# Altium PCB V_5.PcbDoc
Units mm, origin at the board's own origin, x right, y up, seen from the top; angles counter-clockwise.
Board outline 69.85 x 19.9 mm, 2 copper layers (Top Layer, Bottom Layer); 10 components, 43 nets, 80 pads, 40 vias.
Unrouted connection lines stored in the file: 1.
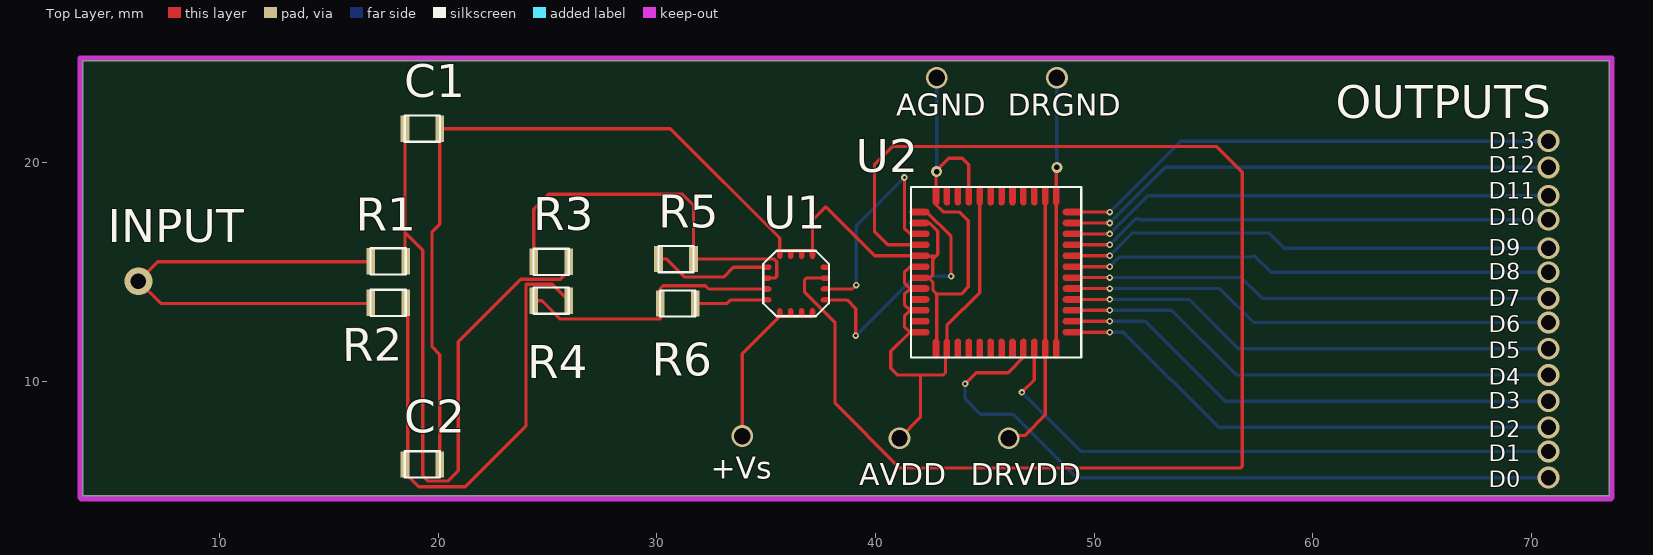
[diagram p0: Top Layer view]
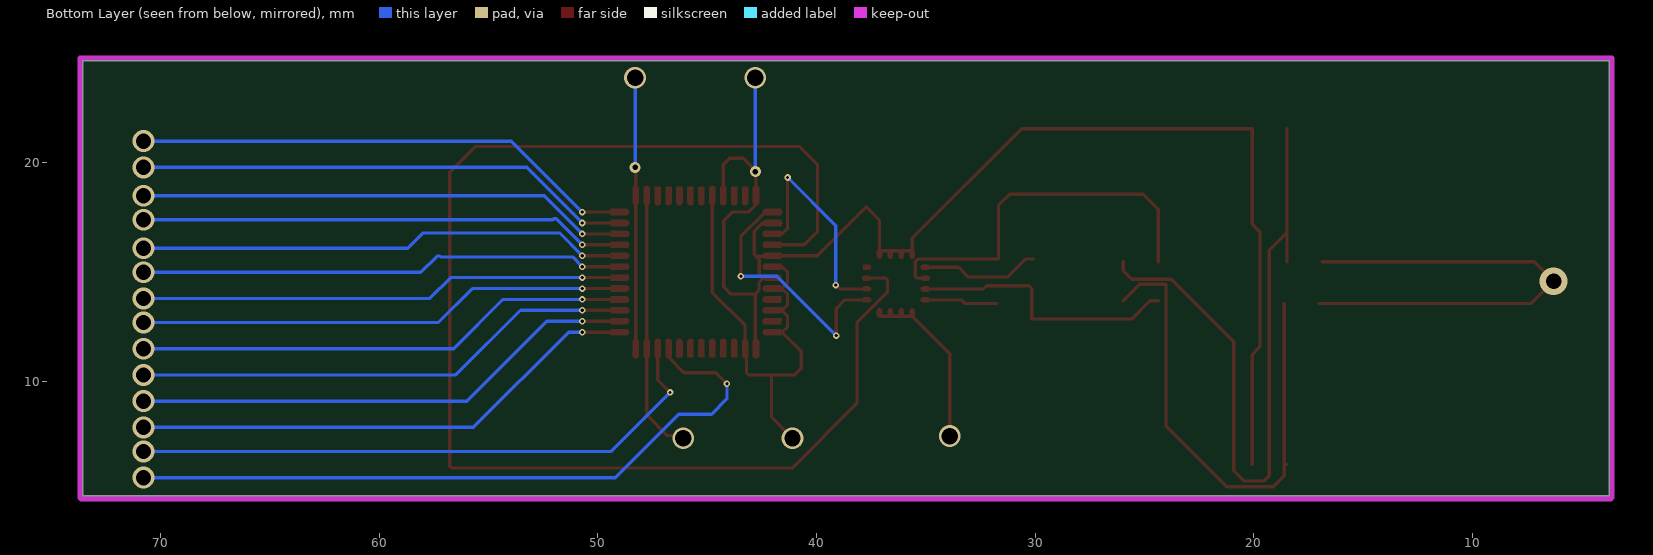
[diagram p1: Bottom Layer view, seen from below]

## Layer stack, top to bottom
Top Solder: solder mask 0.0102, Solder Resist, Dk 3.5
Top Layer: signal copper 0.0356
Dielectric 1: dielectric 0.32, FR-4, Dk 4.8
Bottom Layer: signal copper 0.0356
Bottom Solder: solder mask 0.0102, Solder Resist, Dk 3.5

## Board outline
3.727,4.768 3.727,24.673 73.573,24.673 73.573,4.768

## Design rules (kind name [scope] priority, off if disabled: settings)
Clearance [All] p1: gap=0.08 ignorepadtopadclearanceinfootprint=FALSE
PolygonConnect [All] p1: connectstyle=Relief reliefconductorwidth=0.254 reliefentries=4 polygonreliefangle="90 Angle" airgapwidth=0.254
RoutingTopology [All] p1: topology=Daisy_MidDriven
RoutingVias [All] p1: holewidth=0.711 width=1.27 viastyle="Through Hole" minholewidth=0.711 minwidth=1.27 maxholewidth=0.711 maxwidth=1.27
SolderMaskExpansion [All] p1: expansion=0.102 istentingtop=FALSE
Width [All] p1: maxlimit=0.15 minlimit=0.15 preferedwidth=0.15
29 further rules are at their usual default settings.

## Components (designator, comment, footprint, x,y, rotation, side; value= is the part's Value field where it differs from the comment)
C1 "Capacitor" PCB_C 19.937,21.571 r180 top
C2 "Capacitor" PCB_C 18.591,6.204 r0 top
R1 "Resistor" PCB_R 18.5,15.5 r180 top
R2 "Resistor" PCB_R 18.5,13.6 r180 top
R3 "Resistor" PCB_R 24.357,15.475 r0 top
R4 "Resistor" PCB_R 24.357,13.697 r0 top
R5 "Resistor" PCB_R 31.672,15.602 r180 top
R6 "Resistor" PCB_R 31.748,13.57 r180 top
U1 "Operational_amplifier" PCB_OA 34.867,12.983 r0 top
U2 "Analog-to-Digital_Converter" PCB_ADC 41.619,18.904 r270 top

## Footprints (in the part's own frame and the unit in brackets; to place one, negate y for a bottom-side part, rotate by r counter-clockwise, add the part's x,y. Pads: shape width x height; smd on the part's side, far side on the other; paste and mask are expansions set on the pad)
PCB_ADC [mil]
  round 1 smd mask+2.76: 1(0,261.81) 2(0,242.13) 3(0,222.44) 4(0,202.76) 5(0,183.07) 6(0,163.39) 7(0,143.7) 8(0,124.02) 9(0,104.33) 10(0,84.65) 11(0,64.96) 12(0,45.28) 13(45.28,0) 14(64.96,0) 15(84.65,0) 16(104.33,0) 17(124.02,0) 18(143.7,0) 19(163.39,0) 20(183.07,0) 21(202.76,0) 22(222.44,0) 23(242.13,0) 24(261.81,0) 25(307.09,45.28) 26(307.09,64.96) 27(307.09,84.65) 28(307.09,104.33) 29(307.09,124.02) 30(307.09,143.7) 31(307.09,163.39) 32(307.09,183.07) 33(307.09,202.76) 34(307.09,222.44) 35(307.09,242.13) 36(307.09,261.81) 37(261.81,307.09) 38(242.13,307.09) 39(222.44,307.09) 40(202.76,307.09) 41(183.07,307.09) 42(163.39,307.09) 43(143.7,307.09) 44(124.02,307.09) 45(104.33,307.09) 46(84.65,307.09) 47(64.96,307.09) 48(45.28,307.09)
  Top Layer region: 307.09,157.87 279.13,157.87 276.74,158.42 274.82,159.95 273.76,162.16 273.76,164.61 274.82,166.82 276.74,168.35 279.13,168.9 279.13,168.9 307.09,168.9
  Top Layer region: 307.09,138.19 279.13,138.19 276.74,138.73 274.82,140.26 273.76,142.47 273.76,144.93 274.82,147.14 276.74,148.67 279.13,149.21 279.13,149.21 307.09,149.21
  Top Layer region: 307.09,118.5 279.13,118.5 276.74,119.05 274.82,120.58 273.76,122.79 273.76,125.24 274.82,127.45 276.74,128.98 279.13,129.53 279.13,129.53 307.09,129.53
  Top Layer region: 307.09,98.82 279.13,98.82 276.74,99.36 274.82,100.89 273.76,103.1 273.76,105.56 274.82,107.77 276.74,109.3 279.13,109.84 279.13,109.84 307.09,109.84
  Top Layer region: 307.09,79.13 279.13,79.13 276.74,79.68 274.82,81.21 273.76,83.42 273.76,85.87 274.82,88.08 276.74,89.61 279.13,90.16 279.13,90.16 307.09,90.16
  Top Layer region: 307.09,59.45 279.13,59.45 276.74,59.99 274.82,61.52 273.76,63.73 273.76,66.19 274.82,68.4 276.74,69.93 279.13,70.47 279.13,70.47 307.09,70.47
  Top Layer region: 157.87,0 157.87,27.95 158.42,30.34 159.95,32.26 162.16,33.33 164.61,33.33 166.82,32.26 168.35,30.34 168.9,27.95 168.9,27.95 168.9,0
  Top Layer region: 177.56,0 177.56,27.95 178.1,30.34 179.63,32.26 181.84,33.33 184.3,33.33 186.51,32.26 188.04,30.34 188.58,27.95 188.58,27.95 188.58,0
  Top Layer region: 197.24,0 197.24,27.95 197.79,30.34 199.32,32.26 201.53,33.33 203.98,33.33 206.19,32.26 207.72,30.34 208.27,27.95 208.27,27.95 208.27,0
  Top Layer region: 216.93,0 216.93,27.95 217.47,30.34 219,32.26 221.21,33.33 223.67,33.33 225.88,32.26 227.41,30.34 227.95,27.95 227.95,27.95 227.95,0
  Top Layer region: 256.3,0 256.3,27.95 256.85,30.34 258.37,32.26 260.58,33.33 263.04,33.33 265.25,32.26 266.78,30.34 267.32,27.95 267.32,27.95 267.32,0
  Top Layer region: 307.09,39.76 279.13,39.76 276.74,40.31 274.82,41.84 273.76,44.05 273.76,46.5 274.82,48.71 276.74,50.24 279.13,50.79 279.13,50.79 307.09,50.79
  Top Layer region: 236.61,0 236.61,27.95 237.16,30.34 238.69,32.26 240.9,33.33 243.35,33.33 245.56,32.26 247.09,30.34 247.64,27.95 247.64,27.95 247.64,0
  Top Layer region: 138.19,0 138.19,27.95 138.73,30.34 140.26,32.26 142.47,33.33 144.93,33.33 147.14,32.26 148.67,30.34 149.21,27.95 149.21,27.95 149.21,0
  Top Layer region: 59.45,0 59.45,27.95 59.99,30.34 61.52,32.26 63.73,33.33 66.19,33.33 68.4,32.26 69.93,30.34 70.47,27.95 70.47,27.95 70.47,0
  Top Layer region: 79.13,0 79.13,27.95 79.68,30.34 81.21,32.26 83.42,33.33 85.87,33.33 88.08,32.26 89.61,30.34 90.16,27.95 90.16,27.95 90.16,0
  Top Layer region: 118.5,0 118.5,27.95 119.05,30.34 120.58,32.26 122.79,33.33 125.24,33.33 127.45,32.26 128.98,30.34 129.53,27.95 129.53,27.95 129.53,0
  Top Layer region: 98.82,0 98.82,27.95 99.36,30.34 100.89,32.26 103.1,33.33 105.56,33.33 107.77,32.26 109.3,30.34 109.84,27.95 109.84,27.95 109.84,0
  Top Layer region: 39.76,0 39.76,27.95 40.31,30.34 41.84,32.26 44.05,33.33 46.5,33.33 48.71,32.26 50.24,30.34 50.79,27.95 50.79,27.95 50.79,0
  Top Layer region: 307.09,197.24 279.13,197.24 276.74,197.79 274.82,199.32 273.76,201.53 273.76,203.98 274.82,206.19 276.74,207.72 279.13,208.27 279.13,208.27 307.09,208.27
  Top Layer region: 307.09,177.56 279.13,177.56 276.74,178.1 274.82,179.63 273.76,181.84 273.76,184.3 274.82,186.51 276.74,188.04 279.13,188.58 279.13,188.58 307.09,188.58
  Top Layer region: 39.76,307.09 39.76,279.13 40.31,276.74 41.84,274.82 44.05,273.76 46.5,273.76 48.71,274.82 50.24,276.74 50.79,279.13 50.79,279.13 50.79,307.09
  Top Layer region: 59.45,307.09 59.45,279.13 59.99,276.74 61.52,274.82 63.73,273.76 66.19,273.76 68.4,274.82 69.93,276.74 70.47,279.13 70.47,279.13 70.47,307.09
  Top Layer region: 138.19,307.09 138.19,279.13 138.73,276.74 140.26,274.82 142.47,273.76 144.93,273.76 147.14,274.82 148.67,276.74 149.21,279.13 149.21,279.13 149.21,307.09
  Top Layer region: 157.87,307.09 157.87,279.13 158.42,276.74 159.95,274.82 162.16,273.76 164.61,273.76 166.82,274.82 168.35,276.74 168.9,279.13 168.9,279.13 168.9,307.09
  Top Layer region: 177.56,307.09 177.56,279.13 178.1,276.74 179.63,274.82 181.84,273.76 184.3,273.76 186.51,274.82 188.04,276.74 188.58,279.13 188.58,279.13 188.58,307.09
  Top Layer region: 197.24,307.09 197.24,279.13 197.79,276.74 199.32,274.82 201.53,273.76 203.98,273.76 206.19,274.82 207.72,276.74 208.27,279.13 208.27,279.13 208.27,307.09
  Top Layer region: 216.93,307.09 216.93,279.13 217.47,276.74 219,274.82 221.21,273.76 223.67,273.76 225.88,274.82 227.41,276.74 227.95,279.13 227.95,279.13 227.95,307.09
  Top Layer region: 79.13,307.09 79.13,279.13 79.68,276.74 81.21,274.82 83.42,273.76 85.87,273.76 88.08,274.82 89.61,276.74 90.16,279.13 90.16,279.13 90.16,307.09
  Top Layer region: 118.5,307.09 118.5,279.13 119.05,276.74 120.58,274.82 122.79,273.76 125.24,273.76 127.45,274.82 128.98,276.74 129.53,279.13 129.53,279.13 129.53,307.09
  Top Layer region: 236.61,307.09 236.61,279.13 237.16,276.74 238.69,274.82 240.9,273.76 243.35,273.76 245.56,274.82 247.09,276.74 247.64,279.13 247.64,279.13 247.64,307.09
  Top Layer region: 98.82,307.09 98.82,279.13 99.36,276.74 100.89,274.82 103.1,273.76 105.56,273.76 107.77,274.82 109.3,276.74 109.84,279.13 109.84,279.13 109.84,307.09
  Top Layer region: 256.3,307.09 256.3,279.13 256.85,276.74 258.37,274.82 260.58,273.76 263.04,273.76 265.25,274.82 266.78,276.74 267.32,279.13 267.32,279.13 267.32,307.09
  Top Layer region: 307.09,216.93 279.13,216.93 276.74,217.47 274.82,219 273.76,221.21 273.76,223.67 274.82,225.88 276.74,227.41 279.13,227.95 279.13,227.95 307.09,227.95
  Top Layer region: 307.09,236.61 279.13,236.61 276.74,237.16 274.82,238.69 273.76,240.9 273.76,243.35 274.82,245.56 276.74,247.09 279.13,247.64 279.13,247.64 307.09,247.64
  Top Layer region: 307.09,256.3 279.13,256.3 276.74,256.85 274.82,258.37 273.76,260.58 273.76,263.04 274.82,265.25 276.74,266.78 279.13,267.32 279.13,267.32 307.09,267.32
  Top Layer region: 0,109.84 27.95,109.84 30.34,109.3 32.26,107.77 33.33,105.56 33.33,103.1 32.26,100.89 30.34,99.36 27.95,98.82 27.95,98.82 0,98.82
  Top Layer region: 0,129.53 27.95,129.53 30.34,128.98 32.26,127.45 33.33,125.24 33.33,122.79 32.26,120.58 30.34,119.05 27.95,118.5 27.95,118.5 0,118.5
  Top Layer region: 0,149.21 27.95,149.21 30.34,148.67 32.26,147.14 33.33,144.93 33.33,142.47 32.26,140.26 30.34,138.73 27.95,138.19 27.95,138.19 0,138.19
  Top Layer region: 0,168.9 27.95,168.9 30.34,168.35 32.26,166.82 33.33,164.61 33.33,162.16 32.26,159.95 30.34,158.42 27.95,157.87 27.95,157.87 0,157.87
  Top Layer region: 0,188.58 27.95,188.58 30.34,188.04 32.26,186.51 33.33,184.3 33.33,181.84 32.26,179.63 30.34,178.1 27.95,177.56 27.95,177.56 0,177.56
  Top Layer region: 0,208.27 27.95,208.27 30.34,207.72 32.26,206.19 33.33,203.98 33.33,201.53 32.26,199.32 30.34,197.79 27.95,197.24 27.95,197.24 0,197.24
  Top Layer region: 0,227.95 27.95,227.95 30.34,227.41 32.26,225.88 33.33,223.67 33.33,221.21 32.26,219 30.34,217.47 27.95,216.93 27.95,216.93 0,216.93
  Top Layer region: 0,247.64 27.95,247.64 30.34,247.09 32.26,245.56 33.33,243.35 33.33,240.9 32.26,238.69 30.34,237.16 27.95,236.61 27.95,236.61 0,236.61
  Top Layer region: 0,267.32 27.95,267.32 30.34,266.78 32.26,265.25 33.33,263.04 33.33,260.58 32.26,258.37 30.34,256.85 27.95,256.3 27.95,256.3 0,256.3
  Top Layer region: 0,70.47 27.95,70.47 30.34,69.93 32.26,68.4 33.33,66.19 33.33,63.73 32.26,61.52 30.34,59.99 27.95,59.45 27.95,59.45 0,59.45
  Top Layer region: 0,90.16 27.95,90.16 30.34,89.61 32.26,88.08 33.33,85.87 33.33,83.42 32.26,81.21 30.34,79.68 27.95,79.13 27.95,79.13 0,79.13
  Top Layer region: 0,50.79 27.95,50.79 30.34,50.24 32.26,48.71 33.33,46.5 33.33,44.05 32.26,41.84 30.34,40.31 27.95,39.76 27.95,39.76 0,39.76
  silkscreen extent 0,0 307,307
PCB_C [mm]
  rect 0.4x1.2 smd mask+0.07: 1(1.473,0) 2(-0.127,0)
  silkscreen extent -0.13,-0.6 1.48,0.6
PCB_OA [mil]
  round 1 smd mask+2.76: 1(0,88.58) 2(0,68.9) 3(0,49.21) 4(0,29.53) 5(29.54,0) 6(49.22,0) 7(68.91,0) 8(88.59,0) 9(118.11,29.54) 10(118.11,49.22) 11(118.11,68.91) 12(118.11,88.59) 13(88.57,118.11) 14(68.89,118.11) 15(49.21,118.11) 16(29.52,118.11)
  Top Layer region: 93.1,118.11 93.1,108.27 92.65,106.3 91.39,104.73 89.58,103.85 87.56,103.85 85.75,104.73 84.49,106.3 84.04,108.27 84.04,108.27 84.04,118.11
  Top Layer region: 34.04,118.11 34.04,108.27 33.6,106.3 32.34,104.73 30.52,103.85 28.51,103.85 26.69,104.73 25.44,106.3 24.99,108.27 24.99,108.27 24.99,118.11
  Top Layer region: 73.41,118.11 73.41,108.27 72.97,106.3 71.71,104.73 69.89,103.85 67.88,103.85 66.06,104.73 64.81,106.3 64.36,108.27 64.36,108.27 64.36,118.11
  Top Layer region: 53.74,118.11 53.74,108.27 53.29,106.3 52.04,104.73 50.22,103.85 48.21,103.85 46.39,104.73 45.13,106.3 44.68,108.27 44.68,108.27 44.68,118.11
  Top Layer region: 118.11,84.07 108.27,84.07 106.3,84.51 104.73,85.77 103.85,87.59 103.85,89.6 104.73,91.42 106.3,92.67 108.27,93.12 108.27,93.12 118.11,93.12
  Top Layer region: 0,93.11 9.84,93.11 11.81,92.66 13.38,91.41 14.26,89.59 14.26,87.58 13.38,85.76 11.81,84.5 9.84,84.06 9.84,84.06 0,84.06
  Top Layer region: 118.11,25.01 108.27,25.01 106.3,25.46 104.73,26.72 103.85,28.53 103.85,30.55 104.73,32.36 106.3,33.62 108.27,34.07 108.27,34.07 118.11,34.07
  Top Layer region: 84.07,0 84.07,9.84 84.51,11.81 85.77,13.38 87.59,14.26 89.6,14.26 91.42,13.38 92.67,11.81 93.12,9.84 93.12,9.84 93.12,0
  Top Layer region: 25.01,0 25.01,9.84 25.46,11.81 26.72,13.38 28.53,14.26 30.55,14.26 32.36,13.38 33.62,11.81 34.07,9.84 34.07,9.84 34.07,0
  Top Layer region: 44.7,0 44.7,9.84 45.14,11.81 46.4,13.38 48.22,14.26 50.23,14.26 52.05,13.38 53.3,11.81 53.75,9.84 53.75,9.84 53.75,0
  Top Layer region: 64.38,0 64.38,9.84 64.83,11.81 66.09,13.38 67.9,14.26 69.92,14.26 71.73,13.38 72.99,11.81 73.44,9.84 73.44,9.84 73.44,0
  Top Layer region: 118.11,44.7 108.27,44.7 106.3,45.14 104.73,46.4 103.85,48.22 103.85,50.23 104.73,52.05 106.3,53.3 108.27,53.75 108.27,53.75 118.11,53.75
  Top Layer region: 118.11,64.38 108.27,64.38 106.3,64.83 104.73,66.09 103.85,67.9 103.85,69.92 104.73,71.73 106.3,72.99 108.27,73.44 108.27,73.44 118.11,73.44
  Top Layer region: 0,34.06 9.84,34.06 11.81,33.61 13.38,32.35 14.26,30.54 14.26,28.52 13.38,26.7 11.81,25.45 9.84,25 9.84,25 0,25
  Top Layer region: 0,73.43 9.84,73.43 11.81,72.98 13.38,71.72 14.26,69.91 14.26,67.89 13.38,66.07 11.81,64.82 9.84,64.37 9.84,64.37 0,64.37
  Top Layer region: 0,53.74 9.84,53.74 11.81,53.29 13.38,52.04 14.26,50.22 14.26,48.21 13.38,46.39 11.81,45.13 9.84,44.69 9.84,44.69 0,44.69
  silkscreen extent 0,0 118,118
PCB_R [mm]
  rect 0.4x1.2 smd mask+0.07: 1(1.6,0) 2(0,0)
  silkscreen extent 0,-0.6 1.6,0.6

## Part data
C1 C2: Capacitance="1 mF"
R1 R2 R3 R4 R5 R6: Resistance="1 K"

## Via types
v1: diameter 0.3, hole 0.15, Top Layer to Bottom Layer, 18 vias
v2: diameter 1, hole 0.7, Top Layer to Bottom Layer, 14 vias
v3: diameter 1, hole 0.75, Top Layer to Bottom Layer, 5 vias
v4: diameter 0.5, hole 0.25, Top Layer to Bottom Layer, 2 vias
v5: diameter 1.27, hole 0.711, Top Layer to Bottom Layer, 1 vias

## Nets (pads, with @x,y where several pads share a name; then routed paths per layer and width w, separated by ;. In a path a pad name is that pad's centre, name@x,y a point inside that pad or via, vN(x,y) a via of type N, cw(c..) or ccw(c..) an arc to the next point about the centre after c; other vN are vias at no path point)
GND: C1.2 C2.1 U1.13 U1.14 U1.15 U1.16 U2.1 U2.9 U2.12 U2.14 U2.17 U2.19 U2.25 U2.36 | length 79
  Top Layer w0.15: C2.1 20.064,11.233 19.709,11.589 19.709,16.847 20.064,17.202 C1.2 30.613,21.571 35.617,16.567 U1.16 U1.14 U1.13 37.117,17.38 37.727,17.99 39.962,15.754 U2.17 41.644,15.729 42.76,15.729 ; U2.14 42.466,17.254 42.848,16.872 42.848,15.817 42.76,15.729 ; U2.25 42.797,11.132 42.797,14.002 ; U2.9 44.269,19.92 43.967,20.222 43.356,20.222 42.8,19.666 v4(42.8,19.6) 42.769,19.569 42.769,18.094 43.102,17.761 43.839,17.761 44.248,17.352 44.248,14.335 43.915,14.002 42.797,14.002 ; U2.36 U2.1 48.269,19.769 v4(48.3,19.8) ; 42.76,15.729 42.624,15.593 42.624,14.87 42.467,14.713 42.632,14.548 42.632,14.167 42.797,14.002
  Bottom Layer w0.15: v4(42.8,19.6) v3(42.8,23.9) ; v4(48.3,19.8) v3(48.3,23.9)
NetC1_1: C1.1 R1.2 R3.1 | length 32.2
  Top Layer w0.15: R1.2@18.464,15.475 18.464,16.821 ; C1.1 18.464,16.821 ; R3.1 25.957,15.069 25.57,14.682 23.772,14.682 20.902,11.813 20.902,5.925 20.42,5.442 19.531,5.442 19.277,5.696 19.277,16.008 18.464,16.821
NetC2_2: C2.2 R2.2 R4.1 | length 23.5
  Top Layer w0.15: C2.2 C2.2@18.591,6.204 ; R2.2@18.591,13.57 C2.2@18.591,6.204 ; R4.1 25.202,14.452 24.001,14.452 24.001,7.957 21.233,5.188 19.099,5.188 18.591,5.696 C2.2@18.591,6.204
NetR1_1: R1.1 R2.1 | length 22.1
  Top Layer w0.15: R1.1@16.864,15.475 7.161,15.475 v5(6.272,14.586) 7.288,13.57 R2.1@16.991,13.57
NetR3_2: R3.2 R5.2 U1.2 | length 17.9
  Top Layer w0.15: R3.2 24.357,17.888 25.043,18.574 31.164,18.574 31.672,18.066 R5.2 35.366,15.602 35.482,15.486 35.482,14.821 35.394,14.733 U1.2
NetR4_2: R4.2 R6.1 U1.3 | length 12.4
  Top Layer w0.15: R4.2 24.738,13.697 25.576,12.859 30.148,12.859 30.148,14.256 30.275,14.383 32.208,14.383 32.358,14.233 U1.3
NetR5_1: R5.1 U1.1 | length 5.3
  Top Layer w0.15: R5.1 30.453,15.602 31.276,14.779 33.047,14.779 33.501,15.233 U1.1
NetR6_2: R6.2 U1.4 | length 3.2
  Top Layer w0.15: R6.2 33.221,13.57 33.384,13.733 U1.4
NetU1_5: U1.5 U1.6 U1.7 U1.8 | length 7.7
  Top Layer w0.15: v3(33.9,7.5) 33.9,11.265 U1.5 U1.6 U1.7 U1.8
NetU1_9: U1.9 U2.13 | length 12.2
  Top Layer w0.15: U1.9 38.697,13.733 39.1,13.33 v1(39.1,12.1) ; U2.13 42.34,17.754 43.458,16.636 v1(43.458,14.815)
  Bottom Layer w0.15: v1(39.1,12.1) 41.815,14.815 v1(43.458,14.815)
NetU1_10: U1.10 U2.15 | length 9.9
  Top Layer w0.15: U1.10 38.936,14.233 v1(39.114,14.411) ; v1(41.324,19.336) 41.324,17.008 41.578,16.754 U2.15
  Bottom Layer w0.15: v1(39.114,14.411) 39.114,17.126 v1(41.324,19.336)
NetU1_11: U1.11 U2.16 | length 63.4
  Top Layer w0.15: U1.11@37.867,14.733 36.84,14.733 36.752,14.645 36.752,14.078 38.149,12.681 38.149,8.998 41.11,6.037 56.69,6.037 56.778,6.125 56.778,19.579 55.599,20.758 40.791,20.758 39.952,19.92 39.952,16.872 40.57,16.254 U2.16
NetU2_2: U2.2 U2.35 | length 12.5
  Top Layer w0.15: v3(46.1,7.4) 46.225,7.525 46.825,7.525 47.769,8.469 U2.35 U2.2
NetU2_3: U2.3
NetU2_4: U2.4
NetU2_5: U2.5
NetU2_6: U2.6
NetU2_7: U2.7
NetU2_8: U2.8 U2.18 U2.20 U2.22 U2.24 U2.26 | length 20.8
  Top Layer w0.15: v3(41.1,7.4) 42.056,8.356 42.056,10.3 ; U2.18 41.578,15.254 41.324,15 41.324,14.522 41.592,14.254 41.324,13.986 41.324,13.519 41.589,13.254 41.324,12.989 41.324,12.508 41.578,12.254 40.7,11.376 40.7,10.6 41,10.3 42.056,10.3 ; U2.8 44.769,14.069 43.269,12.569 U2.26 43.2,11.035 43.2,10.388 43.112,10.3 42.056,10.3
NetU2_10: U2.10
NetU2_11: U2.11
NetU2_21: U2.21
NetU2_23: U2.23
NetU2_27: U2.27
NetU2_28: U2.28
NetU2_29: U2.29
NetU2_30: U2.30
NetU2_31: U2.31
NetU2_32: U2.32
NetU2_33: U2.33 | length 32.1
  Top Layer w0.15: v1(44.1,9.9) 44.6,10.4 46.065,10.4 U2.33
  Bottom Layer w0.15: v1(44.1,9.9) 44.1,9.2 44.8,8.5 46.3,8.5 49.2,5.6 v2(70.8,5.6)
NetU2_34: U2.34 | length 27.1
  Top Layer w0.15: v1(46.7,9.5) 47.269,10.069 U2.34
  Bottom Layer w0.15: v1(46.7,9.5) 49.4,6.8 v2(70.8,6.8)
NetU2_37: U2.37 | length 23.1
  Top Layer w0.15: U2.37 v1@50.676,12.254
  Bottom Layer w0.15: v1(50.715,12.254) 51.346,12.254 55.7,7.9 v2(70.8,7.9)
NetU2_38: U2.38 | length 22.8
  Top Layer w0.15: U2.38 v1@50.649,12.754
  Bottom Layer w0.15: v1(50.715,12.754) 52.346,12.754 56,9.1 v2(70.8,9.1)
NetU2_39: U2.39 | length 22.5
  Top Layer w0.15: U2.39 v1@50.657,13.254
  Bottom Layer w0.15: v1(50.715,13.254) 53.546,13.254 56.5,10.3 v2(70.8,10.3)
NetU2_40: U2.40 | length 22.3
  Top Layer w0.15: U2.40 v1@50.665,13.754
  Bottom Layer w0.15: v1(50.715,13.754) 54.346,13.754 56.6,11.5 v2(70.8,11.5)
NetU2_41: U2.41 | length 22
  Top Layer w0.15: U2.41 v1@50.673,14.254
  Bottom Layer w0.15: v1(50.715,14.254) 55.746,14.254 57.3,12.7 v2(70.8,12.7)
NetU2_42: U2.42 | length 21.7
  Top Layer w0.15: U2.42 v1@50.681,14.754
  Bottom Layer w0.15: v1(50.715,14.754) 56.746,14.754 57.7,13.8 v2(70.8,13.8)
NetU2_43: U2.43 | length 21.9
  Top Layer w0.15: U2.43 v1@50.689,15.254
  Bottom Layer w0.15: v1(50.715,15.254) 51.161,15.7 57.2,15.7 57.238,15.738 57.362,15.738 58.1,15 v2(70.8,15)
NetU2_44: U2.44 | length 22.1
  Top Layer w0.15: U2.44 v1@50.697,15.754
  Bottom Layer w0.15: v1(50.715,15.754) 51.761,16.8 58,16.8 58.7,16.1 v2(70.8,16.1)
NetU2_45: U2.45 | length 21.9
  Top Layer w0.15: U2.45 v1@50.7,16.254
  Bottom Layer w0.15: v1(50.715,16.254) 51.904,17.443 52.029,17.443 52.072,17.4 v2(70.8,17.4)
NetU2_46: U2.46 | length 22.1
  Top Layer w0.15: U2.46 v1@50.713,16.754
  Bottom Layer w0.15: v1(50.715,16.754) 52.461,18.5 v2(70.8,18.5)
NetU2_47: U2.47 | length 22.4
  Top Layer w0.15: U2.47 v1@50.721,17.254
  Bottom Layer w0.15: v1(50.715,17.254) 53.261,19.8 v2(70.8,19.8)
NetU2_48: U2.48 | length 22.7
  Top Layer w0.15: U2.48 v1(50.715,17.754)
  Bottom Layer w0.15: v1(50.715,17.754) 53.961,21 v2(70.8,21)
pads on no net: U1.12

## Keep-outs
Keep-Out Layer:
  lines w0.254: 3.6,4.7 3.6,24.8 73.7,24.8 73.7,4.7 73.641,4.641 3.659,4.641

## Silkscreen, mask and mechanical layers (free items; w line width, h text height)
Top Overlay:
  text "AGND" at 40.954,22.154 h1
  text "DRGND" at 46.054,22.154 h1
  text "OUTPUTS" at 61.054,22.054 h1.52
  text "D13" at 68.054,20.654 h0.75
  text "D12" at 68.054,19.554 h0.75
  text "D11" at 68.054,18.354 h0.75
  text "D10" at 68.054,17.154 h0.75
  text "INPUT" at 4.875,16.364 h1.52
  text "D9" at 68.054,15.754 h0.75
  text "D8" at 68.054,14.654 h0.75
  text "D7" at 68.054,13.454 h0.75
  text "D6" at 68.054,12.254 h0.75
  text "D5" at 68.054,11.054 h0.75
  text "D4" at 68.054,9.854 h0.75
  text "D3" at 68.054,8.754 h0.75
  text "D2" at 68.054,7.454 h0.75
  text "D1" at 68.054,6.354 h0.75
  text "+Vs" at 32.454,5.554 h1
  text "AVDD" at 39.254,5.254 h1
  text "DRVDD" at 44.354,5.254 h1
  text "D0" at 68.054,5.154 h0.75